# EAGLE board BMX055 (EAGLE 6.6.0)
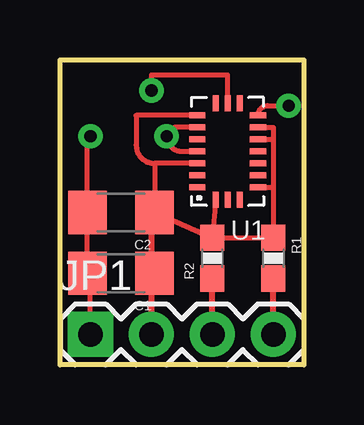
[diagram p0: board, top side]
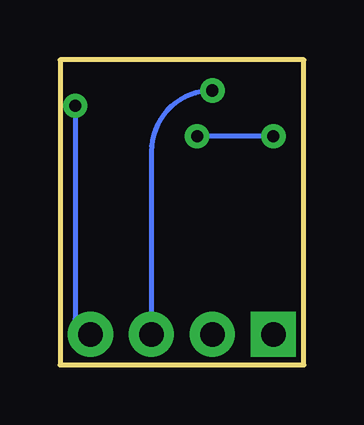
[diagram p1: board, bottom side, seen from below]

Size 10.16 x 12.7 mm. Coordinates in mm from the lower left corner, seen from the top.
Outline: 0,0 0,12.7 10.16,12.7 10.16,0 0,0
Copper layers (1*16): Top 0.035mm / dielectric 1.5mm / Bottom 0.035mm
Design rules "SparkFun": minimum track width 8mil, minimum drill 20mil, track to track 8mil, track to pad 8mil, pad to pad 8mil, via to via 8mil, smd to smd 8mil, copper to edge 8mil, drill to drill 8mil, minimum pad ring 12mil, minimum via ring 10mil, stop-mask expansion 4mil, vias tented up to drill 20mil, thermal gap 10mil

## Footprints (pad centres in the part's own frame; a part is rotated, then mirrored left to right if it is on the bottom)
1206 = smd 1.6 x 1.8: 1 -1.4,0; 2 1.4,0
1X04 = drill 1.016 pad 1.88 square: 1 0,0 | drill 1.016 pad 1.88: 2 2.54,0; 3 5.08,0; 4 7.62,0
0603-RES = smd 1.1 x 1: 1 -0.85,0; 2 0.85,0
BMX055 = smd 0.675 x 0.25: 1 1.262,1.5; 2 1.262,1; 3 1.262,0.5; 4 1.262,0; 5 1.262,-0.5; 6 1.262,-1; 7 1.262,-1.5; 11 -1.262,-1.5; 12 -1.262,-1; 13 -1.262,-0.5; 14 -1.262,0; 15 -1.262,0.5; 16 -1.262,1; 17 -1.262,1.5 | smd 0.25 x 0.675: 8 0.5,-2.013; 9 0,-2.013; 10 -0.5,-2.013; 18 -0.5,2.013; 19 0,2.013; 20 0.5,2.013

## Placement (x,y rotation side)
C1  100nF  [1206]  2.54,3.81 180 top
C2  100nF  [1206]  2.54,6.35 180 top
FRAME1  FRAME-LETTER  [CREATIVE_COMMONS]  -83.82,0 0 top  (outside the outline)
JP1  [1X04]  1.27,1.27 0 top
R1  10K  [0603-RES]  8.89,4.45 270 top
R2  10K  [0603-RES]  6.35,4.45 90 top
U1  BMX055  [BMX055]  6.99,8.89 180 top

## Library data of the parts
C1 C2 = SparkFun-Capacitors
FRAME1 = SparkFun-Aesthetics
JP1 = SparkFun-Connectors
R1 R2 = SparkFun-Resistors; PROD_ID: RES-00824
U1 = x-io

## Nets
GND: C1.2 C2.2 JP1.1 U1.4 U1.6
N$1: JP1.3 R2.1 U1.9
N$2: JP1.4 R1.2 U1.11
VDD: C1.1 C2.1 JP1.2 R1.1 R2.2 U1.3 U1.7 U1.12 U1.13 U1.17 U1.20

## Tracks (layer width: path | path; a pad name or v marks a point on that pad's centre or on a via)
GND  (via drill 0.51)
  Top 0.203: JP1.1 1.27,3.68 arc90 C1.2 C2.2 1.14,9.39 arc-90 v1.27,9.53 | U1.4 5.08,8.89 arc-90 v4.45,9.53 arc-90 4.81,9.89 U1.6
  Bottom 0.203: v1.27,9.53 v4.45,9.53
N$1  (via drill 0.51)
  Top 0.203: U1.9 6.99,12.07 3.81,12.07 v3.81,11.43
  Top 0.254: JP1.3 R2.1
  Bottom 0.203: v3.81,11.43 arc-90 6.35,8.89 JP1.3
N$2  (via drill 0.51)
  Top 0.203: U1.11 arc-90 8.65,10.79 v9.53,10.79
  Top 0.254: JP1.4 R1.2
  Bottom 0.203: v9.53,10.79 9.53,1.9 arc-90 JP1.4
VDD
  Top 0.203: U1.12 8.89,9.89 8.89,9.39 | 8.89,9.39 8.89,7.39 | 8.89,7.39 R1.1 R2.2 | U1.17 8.89,7.39 | U1.13 8.89,9.39 | U1.20 R2.2 | R2.2 C2.1 3.94,8.39 | U1.3 3.94,8.39 | U1.7 3.18,10.39 3.18,9.16 arc90 3.94,8.39
  Top 0.254: 3.81,3.81 3.81,6.35 C2.1 | 3.81,3.81 JP1.2 | 3.81,3.81 C1.1